# EAGLE board EnvironmentOnAStickV2 (EAGLE 7.4.0)
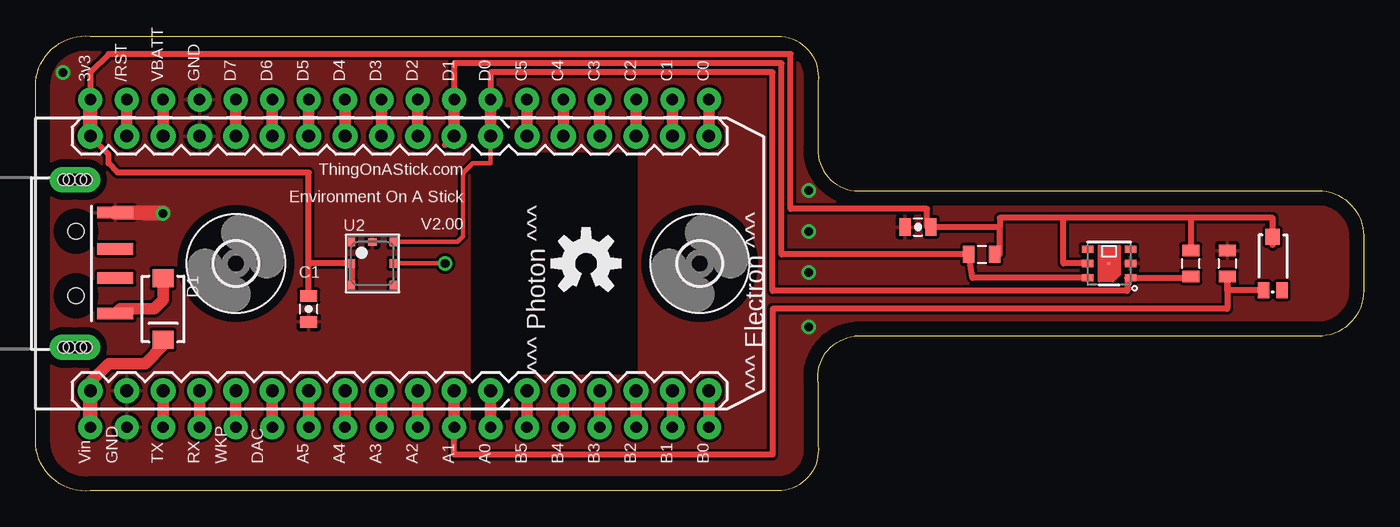
[diagram p0: board, top side]
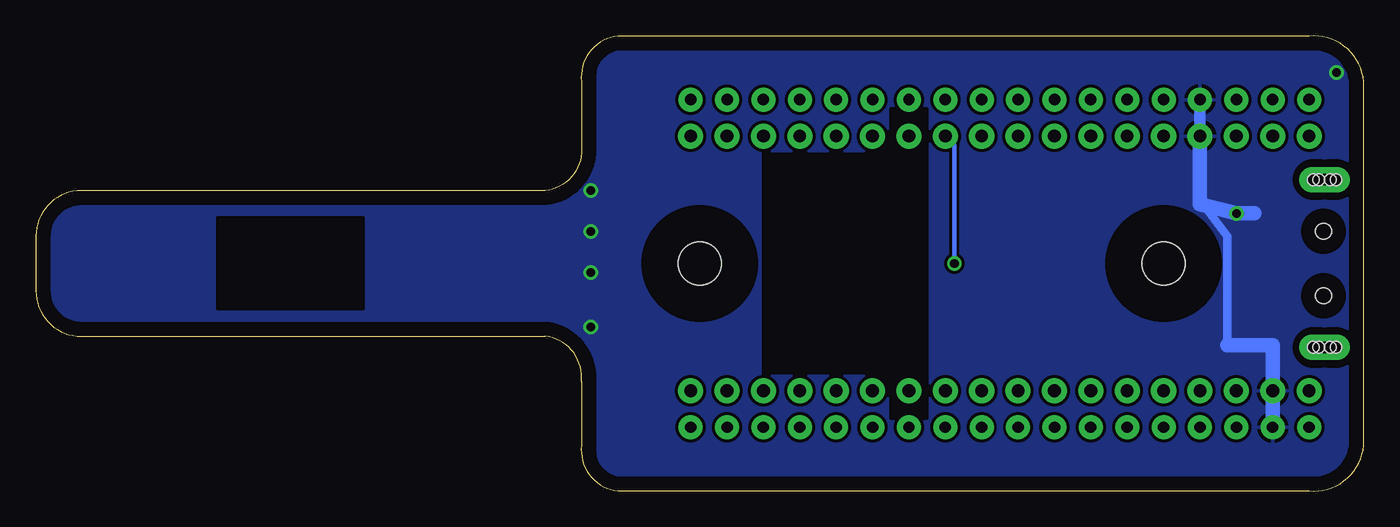
[diagram p1: board, bottom side, seen from below]

Size 92.71 x 31.78 mm. Coordinates in mm from the lower left corner, seen from the top.
Outline: 0,3.19 0,28.59 arc-90 3.81,31.76 52.07,31.76 arc-90 54.61,28.59 54.61,24.14 arc90 57.15,20.97 89.53,20.97 arc-90 92.71,17.79 92.71,13.98 arc-90 89.53,10.81 57.15,10.81 arc90 54.61,7.63 54.61,3.19 arc-90 52.07,0.01 3.81,0.01 arc-90 0,3.19
Copper layers (1*16): Top 0.035mm / dielectric 1.5mm / Bottom 0.035mm
Design rules "default": minimum track width 10mil, minimum drill 24mil, track to track 8mil, track to pad 8mil, pad to pad 8mil, via to via 8mil, smd to smd 8mil, copper to edge 40mil, drill to drill 8mil, minimum pad ring 10mil, minimum via ring 8mil, stop-mask expansion 4mil, vias tented up to drill 0mil, thermal gap 10mil
tRestrict: area 30.5,5.1 to 41.9,26.7
bRestrict: area 30.5,5.1 to 41.9,26.7; area 69.8,12.7 to 80,19.1

## Footprints (pad centres in the part's own frame; a part is rotated, then mirrored left to right if it is on the bottom)
0805-CAP = smd 0.8 x 1.2: 1 -0.9,0; 2 0.9,0
SMA-DIODE = smd 1.27 x 1.47: A -2.15,0; C 2.15,0
3,0 = hole 3: 0,0
USB-A-SMT-MALE = smd 0.8 x 2.5: D+1 1.027,-5.87; D-1 -1.027,-5.87; GND1 3.551,-5.87; VBUS1 -3.5,-5.87 | drill 0.8 pad 1.778 long: P$1 5.85,-3.05; P$3 -5.85,-3.05 | hole 1.1: 2.25,-3.12; -2.25,-3.12 | hole 0.8: -5.85,-3.45; -5.85,-3.85; -5.85,-2.65; -5.85,-2.25; 5.85,-3.45; 5.85,-3.85; 5.85,-2.65; 5.85,-2.25
0805 = smd 0.8 x 1.2: 1 -0.9,0; 2 0.9,0
HTU21D = smd 0.2 x 0.2: 7 0,0 | smd 0.8 x 0.5: DATA 1.5,-1; GND 1.5,0; NC@1 -1.5,1; NC@6 1.5,1; SCK -1.5,-1; VDD -1.5,0
BMP180 = smd 0.6 x 0.5: 1 1.5,1.45; 2 0,1.45; 3 -1.5,1.45; 4 -1.5,-1.45; 5 0,-1.45; 6 1.5,-1.45 | smd 0.5 x 0.6: 7 1.5,0
TEMT6000-SEN = smd 1.1 x 0.8: BASE -1.87,-0.65; EMITTER -1.87,0.65 | smd 1.1 x 1: COLLECTOR 1.86,0.01
ELECTRON_SIMPLE_SILK_NAMES_DUAL = drill 0.889 pad 1.753: 3V3 1.27,22.86; A0 29.21,5.08; A1 26.67,5.08; A2 24.13,5.08; A3 21.59,5.08; A4 19.05,5.08; A5 16.51,5.08; B0 44.45,5.08; B1 41.91,5.08; B2 39.37,5.08; B3 36.83,5.08; B4 34.29,5.08; B5 31.75,5.08; C0 44.45,22.86; C1 41.91,22.86; C2 39.37,22.86; C3 36.83,22.86; C4 34.29,22.86; C5 31.75,22.86; D0 29.21,22.86; D1 26.67,22.86; D2 24.13,22.86; D3 21.59,22.86; D4 19.05,22.86; D5 16.51,22.86; D6 13.97,22.86; D7 11.43,22.86; DAC 13.97,5.08; GND 8.89,22.86; GND@2 3.81,5.08; RST 3.81,22.86; RX 8.89,5.08; TX 6.35,5.08; VBAT 6.35,22.86; VIN 1.27,5.08; WKP 11.43,5.08 | drill 0.8 pad 1.676: 3V3_1 1.27,25.4; A0_1 29.21,2.54; A1_1 26.67,2.54; A2_1 24.13,2.54; A3_1 21.59,2.54; A4_1 19.05,2.54; A5_1 16.51,2.54; B0_1 44.45,2.54; B1_1 41.91,2.54; B2_1 39.37,2.54; B3_1 36.83,2.54; B4_1 34.29,2.54; B5_1 31.75,2.54; C0_1 44.45,25.4; C1_1 41.91,25.4; C2_1 39.37,25.4; C3_1 36.83,25.4; C4_1 34.29,25.4; C5_1 31.75,25.4; D0_1 29.21,25.4; D1_1 26.67,25.4; D2_1 24.13,25.4; D3_1 21.59,25.4; D4_1 19.05,25.4; D5_1 16.51,25.4; D6_1 13.97,25.4; D7_1 11.43,25.4; DAC_1 13.97,2.54; GND_1 8.89,25.4; GND_1B 3.81,2.54; RST_1 3.81,25.4; RX_1 8.89,2.54; TX_1 6.35,2.54; VBATT_1 6.35,25.4; VIN_1B 1.27,2.54; WKP_1 11.43,2.54

## Placement (x,y rotation side)
C1  1.0uF  [0805-CAP]  19.05,12.71 90 top
C4  1.0uF  [0805-CAP]  61.59,18.43 0 top
D1  [SMA-DIODE]  8.89,12.71 270 top
FRAME1  FRAME-LETTER  [CREATIVE_COMMONS]  1.27,-17.13 0 top  (outside the outline)
H1  MOUNT-HOLE3.0  [3,0]  13.97,15.89 0 top
H2  MOUNT-HOLE3.0  [3,0]  46.35,15.89 0 top
JP1  USBA-SMD-MALE  [USB-A-SMT-MALE]  -0.32,15.89 90 top
LOGO1  OSHW-LOGOM  [OSHW-LOGO-M]  38.42,15.89 0 top
R3  4k7  [0805]  80.64,15.89 90 top
R4  4k7  [0805]  66.04,16.52 0 top
R6  10k  [0805]  83.19,15.89 270 top
U1  HTU21DSMD  [HTU21D]  74.93,15.89 0 top
U2  BMP180  [BMP180]  23.5,15.89 90 top
U4  LIGHTSENSORTEMT6000  [TEMT6000-SEN]  86.36,15.89 90 top
U$1  ELECTRONDUALNAMED  [ELECTRON_SIMPLE_SILK_NAMES_DUAL]  2.54,1.92 0 top

## Library data of the parts
C1 C4 = SparkFun-Capacitors; PROD_ID: CAP-11625
D1 = SparkFun-DiscreteSemi
FRAME1 LOGO1 = SparkFun-Aesthetics
H1 H2 = holes
JP1 U$1 = Tinamous
R3 R4 R6 = SparkFun-Resistors
U1 = SparkFun-Sensors; PROD_ID: IC-11793
U2 U4 = SparkFun-Sensors

## Nets
1WIRE-DQ: U$1.D5 U$1.D5_1
3.3V: C1.2 C4.2 R3.2 R4.2 U1.VDD U2.2 U2.3 U4.COLLECTOR U$1.3V3 U$1.3V3_1
5V: D1.C U$1.VIN U$1.VIN_1B
EXTERNAL_INT: U$1.D4 U$1.D4_1
GND: C1.1 C4.1 JP1.GND1 R6.1 U1.7 U1.GND U2.7 U$1.GND U$1.GND@2 U$1.GND_1 U$1.GND_1B
INT: U$1.D3 U$1.D3_1
LIGHTLEVEL_ANALOG: R6.2 U4.EMITTER U$1.A1 U$1.A1_1
N$1: U$1.RST U$1.RST_1
N$2: U$1.VBAT U$1.VBATT_1
N$3: U$1.D7 U$1.D7_1
N$4: U$1.D6 U$1.D6_1
N$5: D1.A JP1.VBUS1
N$8: U$1.D2 U$1.D2_1
N$11: U$1.C5 U$1.C5_1
N$12: U$1.C4 U$1.C4_1
N$13: U$1.C3 U$1.C3_1
N$14: U$1.C2 U$1.C2_1
N$15: U$1.C1 U$1.C1_1
N$16: U$1.C0 U$1.C0_1
N$17: U$1.B0 U$1.B0_1
N$18: U$1.B1 U$1.B1_1
N$19: U$1.B2 U$1.B2_1
N$20: U$1.B3 U$1.B3_1
N$21: U$1.B4 U$1.B4_1
N$22: U$1.B5 U$1.B5_1
N$25: U$1.A2 U$1.A2_1
N$26: U$1.A3 U$1.A3_1
N$27: U$1.A4 U$1.A4_1
N$28: U$1.A5 U$1.A5_1
N$29: U$1.DAC U$1.DAC_1
N$30: U$1.WKP U$1.WKP_1
N$31: U$1.RX U$1.RX_1
N$32: U$1.TX U$1.TX_1
SCL: R4.1 U1.SCK U2.5 U$1.D1 U$1.D1_1
SDA: R3.1 U1.DATA U2.6 U$1.D0 U$1.D0_1
UV_LEVEL: U$1.A0 U$1.A0_1

## Tracks (layer width: path | path; a pad name or v marks a point on that pad's centre or on a via)
1WIRE-DQ
  Top 0.813: U$1.D5_1 U$1.D5
3.3V
  Top 0.406: U4.COLLECTOR 86.36,17.17 86.36,19.06 80.64,19.06 | 80.64,19.06 R3.2 | U1.VDD 71.75,15.89 71.75,19.06 | R4.2 67.31,16.52 67.31,18.43 | 67.31,18.43 C4.2 62.23,18.43 62.23,19.7 52.7,19.7 52.7,30.49 5.08,30.49 3.81,29.22 U$1.3V3_1 | 19.05,15.89 U2.2 U2.3 | 19.05,15.89 19.05,22.24 5.71,22.24 5.08,22.87 5.08,23.51 U$1.3V3 | C1.2 19.05,15.89 | 80.64,19.06 71.75,19.06 | 71.75,19.06 67.31,19.06 67.31,18.43
  Top 1.016: U$1.3V3 U$1.3V3_1
5V
  Top 0.813: U$1.VIN 3.81,7.63 5.08,8.9 7.62,8.9 8.89,10.17 D1.C
  Top 1.016: U$1.VIN_1B U$1.VIN
EXTERNAL_INT
  Top 0.813: U$1.D4 U$1.D4_1
GND  (via drill 0.6)
  Top 1.016: JP1.GND1 8.89,19.44 v8.89,19.38 7.62,19.38
  Bottom 0.61: U$1.GND 11.43,20.33 9.53,17.79 9.53,10.17
  Bottom 0.813: U$1.GND_1 U$1.GND
  Bottom 1.016: U$1.GND 11.43,20.02 v8.89,19.38 7.62,19.38 | 9.53,10.17 6.35,10.17 U$1.GND@2 U$1.GND_1B
  other vias: 53.98,18.11 53.98,15.25 53.98,20.97 1.91,29.22 53.98,11.44
  pour Bottom: 102.23,32.4 102.23,-0.62 -0.64,-0.62 -0.64,32.4
  pour Top: -0.64,32.4 102.23,31.76 102.23,-1.26 -0.64,-0.62
INT
  Top 0.813: U$1.D3 U$1.D3_1
LIGHTLEVEL_ANALOG
  Top 0.406: U$1.A1_1 29.21,2.55 51.44,2.55 51.44,12.71 83.19,12.71 R6.2 83.19,14.02 U4.EMITTER
  Top 0.813: U$1.A1_1 U$1.A1
N$1
  Top 0.813: U$1.RST U$1.RST_1
N$2
  Top 0.813: U$1.VBATT_1 U$1.VBAT
N$3
  Top 0.813: U$1.D7_1 U$1.D7
N$4
  Top 0.813: U$1.D6_1 U$1.D6
N$5
  Top 0.813: D1.A 8.89,13.35 8.26,12.71 5.88,12.71 JP1.VBUS1
N$8
  Top 0.813: U$1.D2_1 U$1.D2
N$11
  Top 0.813: U$1.C5 U$1.C5_1
N$12
  Top 0.813: U$1.C4_1 U$1.C4
N$13
  Top 0.813: U$1.C3 U$1.C3_1
N$14
  Top 0.813: U$1.C2_1 U$1.C2
N$15
  Top 0.813: U$1.C1 U$1.C1_1
N$16
  Top 0.813: U$1.C0_1 U$1.C0
N$17
  Top 0.813: U$1.B0 U$1.B0_1
N$18
  Top 0.813: U$1.B1_1 U$1.B1
N$19
  Top 0.813: U$1.B2 U$1.B2_1
N$20
  Top 0.813: U$1.B3_1 U$1.B3
N$21
  Top 0.813: U$1.B4 U$1.B4_1
N$22
  Top 0.813: U$1.B5_1 U$1.B5
N$25
  Top 0.813: U$1.A2 U$1.A2_1
N$26
  Top 0.813: U$1.A3_1 U$1.A3
N$27
  Top 0.813: U$1.A4 U$1.A4_1
N$28
  Top 0.813: U$1.A5 U$1.A5_1
N$29
  Top 0.813: U$1.DAC U$1.DAC_1
N$30
  Top 0.813: U$1.WKP U$1.WKP_1
N$31
  Top 0.813: U$1.RX U$1.RX_1
N$32
  Top 0.813: U$1.TX U$1.TX_1
SCL  (via drill 0.6)
  Top 0.305: U2.5 v28.57,15.89
  Top 0.406: U1.SCK 65.41,14.89 R4.1 52.07,16.52 52.07,29.86 29.21,29.86 U$1.D1_1 | 28.57,24.14 U$1.D1
  Top 0.813: U$1.D1 U$1.D1_1
  Bottom 0.305: v28.57,15.89 28.57,24.14 U$1.D1
SDA
  Top 0.305: U2.6 29.44,17.39 29.84,17.79 29.84,22.24 30.48,22.87 31.75,22.87 U$1.D0
  Top 0.406: R3.1 80.64,14.89 U1.DATA 76.2,14.89 76.2,13.98 51.44,13.98 51.44,29.22 31.75,29.22 U$1.D0_1
  Top 0.813: U$1.D0_1 U$1.D0
UV_LEVEL
  Top 0.813: U$1.A0 U$1.A0_1

## Text on the board
tNames: ThingOnAStick.com | Environment On A Stick | V2.00 | ^^^ Photon ^^^ | ^^^ Electron ^^^